# Altium PCB 14语音模块OK - 实验.PcbDoc
Units mm, origin at the board's own origin, x right, y up, seen from the top; angles counter-clockwise.
Board outline 29.69 x 23.86 mm, 2 copper layers (Top Layer, Bottom Layer); 3 components, 11 nets, 22 pads, 21 vias.
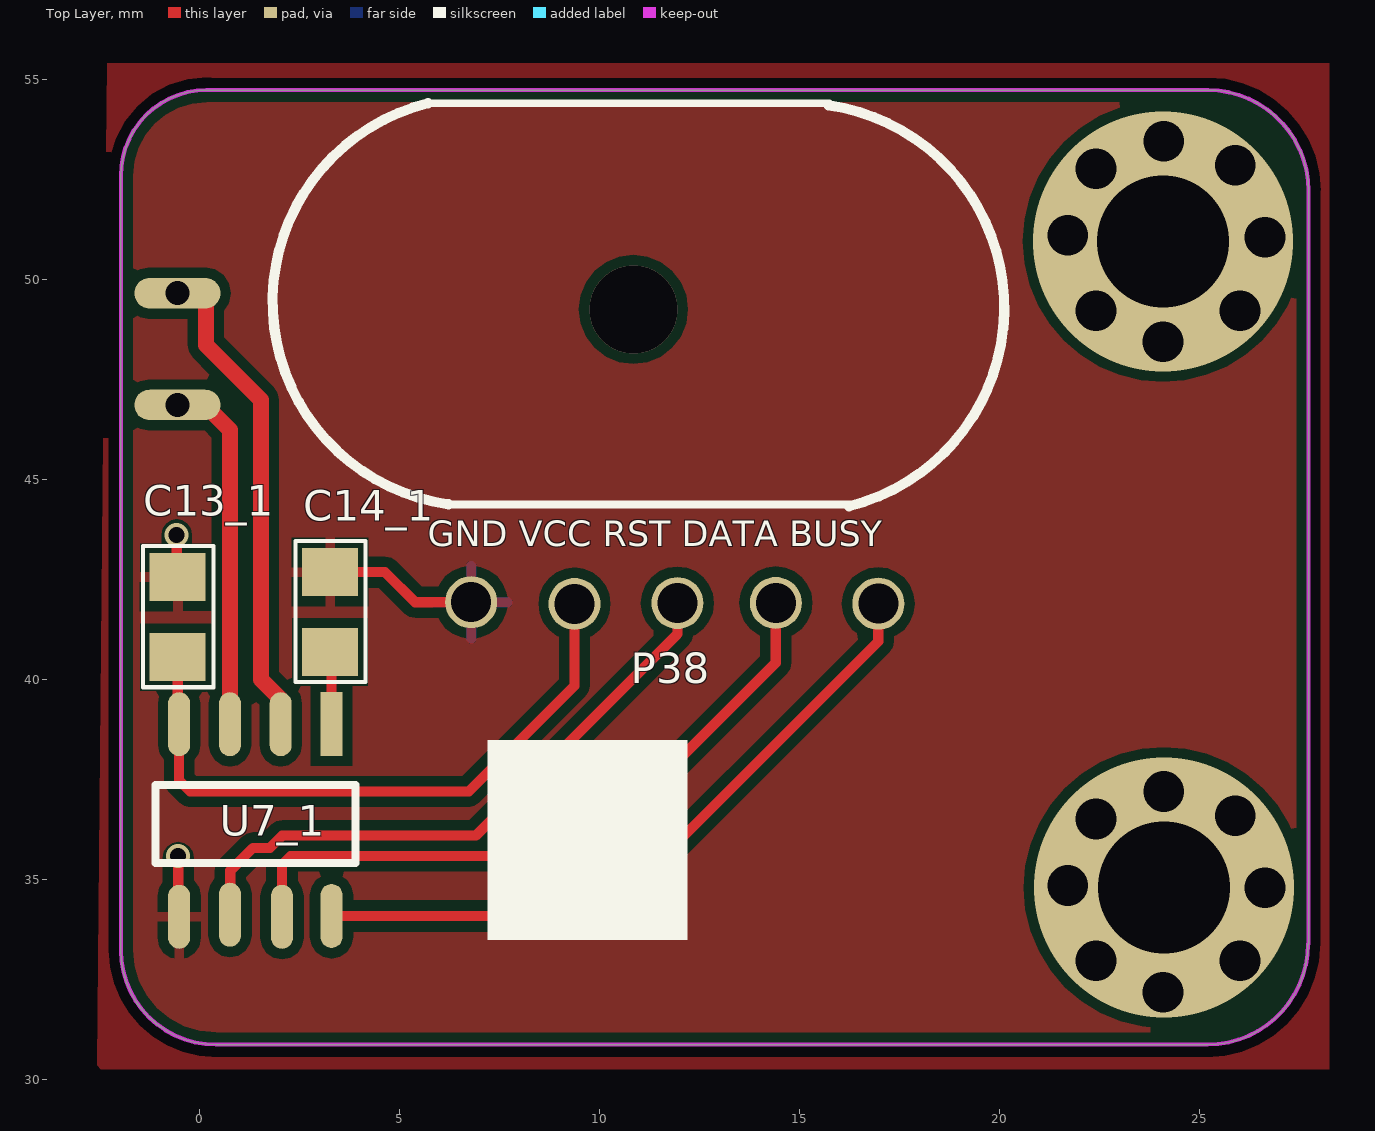
[diagram p0: Top Layer view]
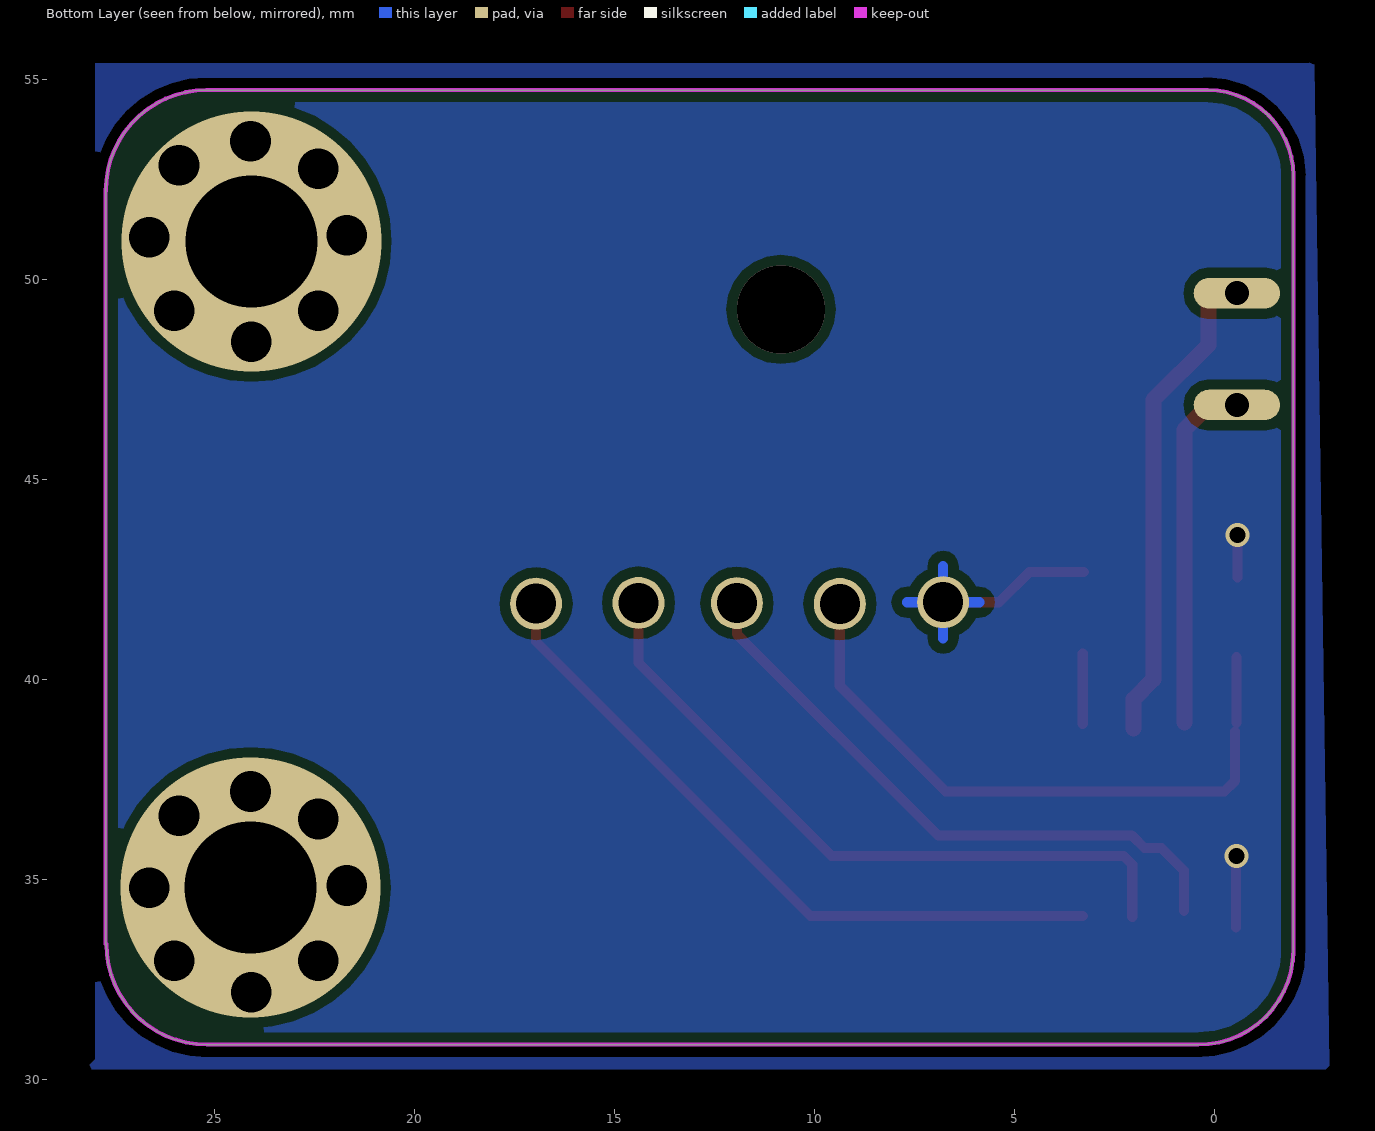
[diagram p1: Bottom Layer view, seen from below]

## Layer stack, top to bottom
Top Solder: solder mask 0.0102, Solder Resist, Dk 3.5
Top Layer: signal copper 0.0356
Dielectric1: dielectric 0.32, FR-4, Dk 4.8
Bottom Layer: signal copper 0.0356
Bottom Solder: solder mask 0.0102, Solder Resist, Dk 3.5

## Board outline
-1.974,33.224 -1.974,52.594 cw(c0.168,52.594) 0.168,54.736 25.198,54.736 cw(c25.198,52.217) 27.717,52.217 27.717,33.386 27.703,33.386 cw(c25.188,33.386) 25.188,30.871 0.409,30.871 cw(c0.394,33.239)

## Design rules (kind name [scope] priority, off if disabled: settings)
Clearance CAM_Clearance_2 [OnLayer('Top Layer')] p1: gap=0.254 ignorepadtopadclearanceinfootprint=FALSE except(0: Arc-Hole Track-Hole SMDPad-Hole THPad-Hole Via-Hole Fill-Hole Poly-Hole Region-Hole Text-Hole)
Clearance CAM_Clearance_1 [OnLayer('Bottom Layer')] p2: gap=0.254 ignorepadtopadclearanceinfootprint=FALSE except(0: Arc-Hole Track-Hole SMDPad-Hole THPad-Hole Via-Hole Fill-Hole Poly-Hole Region-Hole Text-Hole)
Clearance [All] p3: gap=0.254 ignorepadtopadclearanceinfootprint=FALSE except(0: Arc-Hole Track-Hole SMDPad-Hole THPad-Hole Via-Hole Fill-Hole Poly-Hole Region-Hole Text-Hole)
PolygonConnect PolygonConnect_1 [isvia] p1: connectstyle=Direct reliefconductorwidth=0.254 reliefentries=4 polygonreliefangle="90 Angle" airgapwidth=0.254
PolygonConnect [All] p2: connectstyle=Relief reliefconductorwidth=0.254 reliefentries=4 polygonreliefangle="90 Angle" airgapwidth=0.254
RoutingVias [All] p1: holewidth=0.711 width=1.27 viastyle="Through Hole" minholewidth=0.711 minwidth=1.27 maxholewidth=0.711 maxwidth=1.27
SilkToSolderMaskClearance SilkscreenOverComponentPads [IsPad] p1: minsilkscreentomaskgap=0.254 clearancetoexposedcopper=TRUE
SolderMaskExpansion [All] p1: expansion=0.102
Width CAM_Width_1 [OnLayer('Bottom Layer')] p1: maxlimit=0.279 minlimit=0.102 preferedwidth=0.127
Width [All] p2: maxlimit=0.508 minlimit=0.254 preferedwidth=0.254
29 further rules are at their usual default settings.

## Components (designator, comment, footprint, x,y, rotation, side; value= is the part's Value field where it differs from the comment)
C13_1 "104 50V 10%" 0805-R -0.553,41.558 r270 top
C14_1 "104 50V 10%" 0805-R 3.257,41.685 r270 top
U7_1 "丝印打磨" sop8 1.387,36.475 r270 top

## Footprints (in the part's own frame and the unit in brackets; to place one, negate y for a bottom-side part, rotate by r counter-clockwise, add the part's x,y. Pads: shape width x height; smd on the part's side, far side on the other; paste and mask are expansions set on the pad)
0805-R [mm]
  rect 1.2x1.4 smd: 1(-1,0) 2(1,0)
  silkscreen extent -1.78,-0.86 1.75,0.89, body extent -0.97,-0.61 1.03,0.64, height 0.55
sop8 [mm]
  rect 1.6x0.55 smd paste+0 mask+0.102: 1(-2.408,1.905)
  oval 1.6x0.55 smd paste+0 mask+0.102: 1(-2.408,-0.635) 1(-2.408,0.635) 1(-2.408,-1.905) 1(2.355,-0.635) 1(2.387,1.905) 1(2.408,0.667) 1(2.408,-1.905)
  silkscreen extent -0.88,-2.5 1.06,2.5

## Free pads (board coordinates)
  oval 0.55x1.6 smd paste+0 mask+0.102: 1(0.752,38.883) 1(2.022,38.883)
  rect 0.55x1.6 smd paste+0 mask+0.102: 1(3.292,38.883)
  round 1.3 hole 1: 1(6.784,41.931) 1(9.366,41.889) 1(11.938,41.91) 1(14.398,41.915) 1(16.96,41.894)
  oval 2.159x0.762 hole 0.6: 2(-0.56,46.863) 2(-0.56,49.657)

## Via types
v1: diameter 1.016, hole 1.016, Top Layer to Bottom Layer, 16 vias
v2: diameter 0.6, hole 0.4, Top Layer to Bottom Layer, 2 vias
v3: diameter 6.5, hole 3.3, Top Layer to Bottom Layer, 2 vias
v4: diameter 2.2, hole 2.2, Top Layer to Bottom Layer, 1 vias

## Nets (pads, with @x,y where several pads share a name; then routed paths per layer and width w, separated by ;. In a path a pad name is that pad's centre, name@x,y a point inside that pad or via, vN(x,y) a via of type N, cw(c..) or ccw(c..) an arc to the next point about the centre after c; other vN are vias at no path point)
$Net0: C13_1.1 C14_1.1 pad.1@6.784,41.931 U7_1.1@-0.518,34.067 | length 10.3
  Top Layer w0.254: C13_1.1@-0.576,42.558 v2@-0.576,43.624 ; U7_1.1@-0.538,33.803 v2@-0.538,35.549 ; C14_1.1 4.63,42.685 5.384,41.931 pad.1@6.784,41.931
  Bottom Layer w0.254: 5.88,41.931 pad.1@6.784,41.931 ; 6.784,41.027 pad.1@6.784,41.931 ; 6.784,42.835 pad.1@6.784,41.931 ; 7.688,41.931 pad.1@6.784,41.931
  other v2: -0.55,35.581 -0.581,43.614
$Net1: pad.1@0.752,38.883 pad.2@-0.56,46.863 U7_1.1@0.752,38.883 | length 8.4
  Top Layer w0.4: pad.2@0,46.99 0.752,46.238 U7_1.1@0.752,38.925
$Net2: pad.1@2.022,38.883 pad.2@-0.56,49.657 U7_1.1@2.022,38.883 | length 11.6
  Top Layer w0.4: pad.2@0.148,49.636 0.148,48.366 1.524,46.99 1.524,40.005 2.022,39.507 2.022,38.883 U7_1.1@2.022,38.777
$Net3: C13_1.2 pad.1@9.366,41.889 U7_1.1@-0.518,38.883 | length 16
  Top Layer w0.254: U7_1.1@-0.553,38.918 C13_1.2 ; U7_1.1@-0.518,38.7 -0.518,37.47 -0.248,37.2 6.721,37.2 9.366,39.845 pad.1@9.366,41.889
$Net4: pad.1@11.938,41.91 U7_1.1@0.752,34.12 | length 15.4
  Top Layer w0.254: U7_1.1@0.761,34.215 0.761,35.222 1.326,35.787 1.747,35.787 2.057,36.097 6.9,36.097 11.938,41.135 pad.1@11.938,41.91
$Net5: pad.1@14.398,41.915 U7_1.1@2.054,34.067 | length 17.2
  Top Layer w0.254: U7_1.1@2.054,34.067 2.054,35.375 2.267,35.589 9.567,35.589 14.398,40.42 pad.1@14.398,41.915
$Net6: pad.1@16.96,41.894 U7_1.1@3.292,34.088 | length 17.5
  Top Layer w0.254: U7_1.1@3.292,34.088 10.098,34.088 16.96,40.949 pad.1@16.96,41.894
$Net7: 
  other v1: 24.077,32.183 22.405,32.966 26.003,32.966 26.628,34.797 21.696,34.85 22.405,36.511 25.887,36.596 24.098,37.2
  other v3: 24.098,34.797
$Net8: 
$Net9: 
  other v4: 10.837,49.254
$Net10: C14_1.2 pad.1@3.292,38.883 U7_1.1@3.292,38.883 | length 1.8
  Top Layer w0.254: U7_1.1@3.292,38.883 C14_1.2@3.292,40.65
copper on no net:
  other v1: 24.077,48.439 22.405,49.222 26.003,49.222 26.628,51.053 21.696,51.106 22.405,52.767 25.887,52.852 24.098,53.456
  other v3: 24.077,50.956

## Polygon pours and split planes (outlines as drawn)
$Net0 on Bottom Layer "Bottom Layer-$Net0" (solid, pour order 4): -2.498,55.528 -2.371,55.401 27.982,55.401 27.982,30.509 28.236,30.255 -2.873,30.255
$Net0 on Top Layer "Top Layer-$Net0" (solid, pour order 6): -2.316,55.401 28.236,55.401 28.236,30.255 -2.498,30.255 -2.571,30.328

## Keep-outs
Keep-Out Layer:
  lines w0.1: -1.974,33.224 -1.974,52.594 ; 0.168,54.736 25.198,54.736 ; 0.409,30.871 25.188,30.871 ; 27.717,33.386 27.717,52.217
  lines w0.102: -1.974,33.224 ccw(c0.394,33.239) 0.409,30.871 ; -1.974,52.594 cw(c0.168,52.594) 0.168,54.736 ; 25.188,30.871 ccw(c25.188,33.386) 27.703,33.386 ; 25.198,54.736 cw(c25.198,52.217) 27.717,52.217

## Silkscreen, mask and mechanical layers (free items; w line width, h text height)
Top Overlay:
  rectangle: 7.192,33.481 12.192,38.481
  lines w0.2: 5.7,54.406 15.723,54.406 ; 6.213,44.381 16.236,44.381
  lines w0.254: 5.7,54.406 ccw(c6.932,49.443) 6.213,44.381 ; 15.715,54.356 cw(c14.997,49.293) 16.229,44.331
  text "GND VCC RST DATA BUSY" at 5.7,43.336 h0.64
  text "P38" at 10.767,39.907 h0.76